# EAGLE board TDA7053A Stereo (EAGLE 6.2)
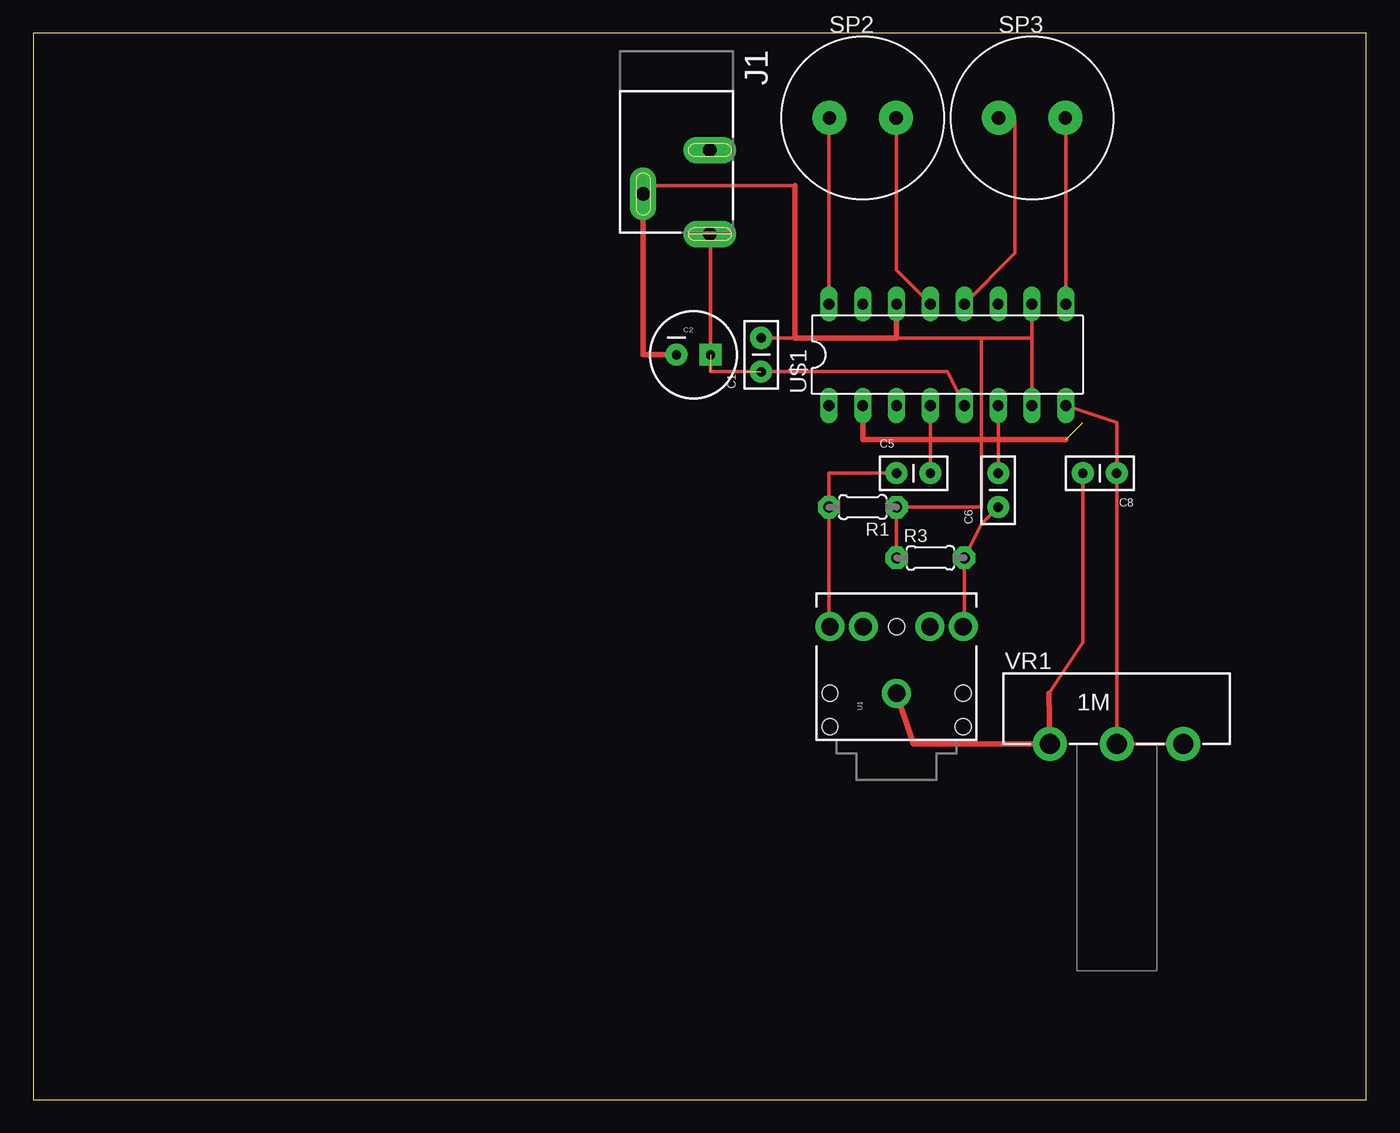
[diagram p0: board, top side]
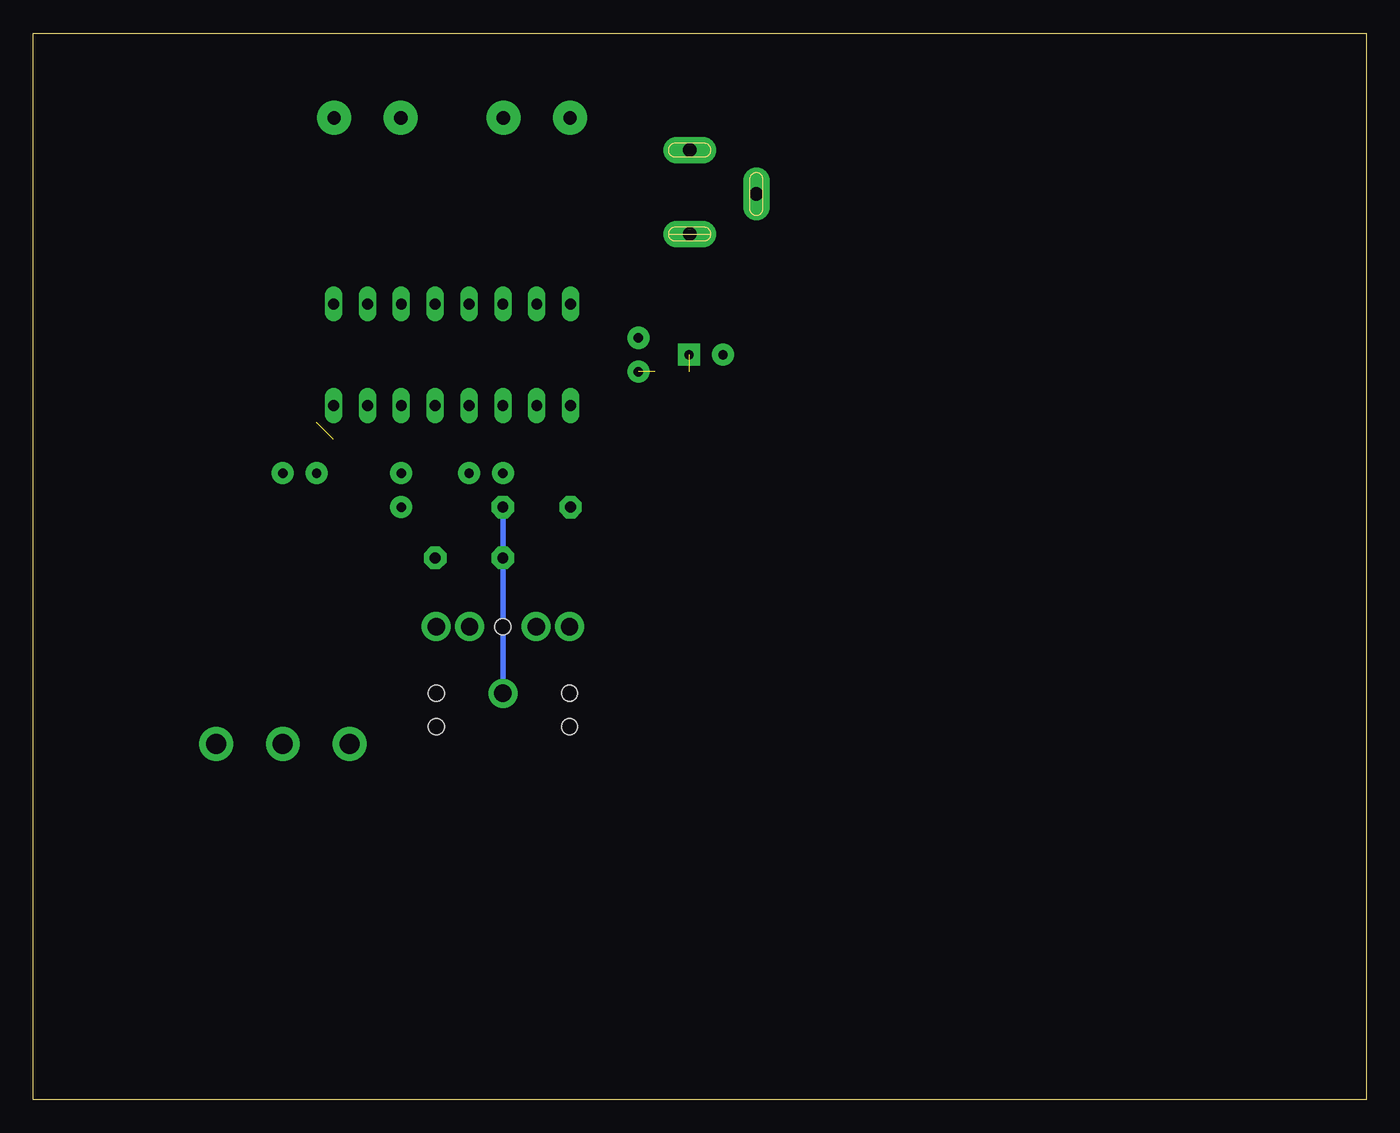
[diagram p1: board, bottom side, seen from below]

Size 100 x 80 mm. Coordinates in mm from the lower left corner, seen from the top.
Outline: 0,0 100,0 100,80 0,80 0,0
Copper layers (1*16): Top 0.035mm / dielectric 1.5mm / Bottom 0.035mm
Design rules: minimum track width 10mil, minimum drill 24mil, track to track 8mil, track to pad 8mil, pad to pad 8mil, via to via 8mil, smd to smd 8mil, copper to edge 40mil, drill to drill 8mil, minimum pad ring 10mil, minimum via ring 8mil, stop-mask expansion 4mil, vias tented up to drill 0mil, thermal gap 10mil

## Footprints (pad centres in the part's own frame; a part is rotated, then mirrored left to right if it is on the bottom)
CAP-PTH-SMALL2 = drill 0.7 pad 1.651: 1 0,0; 2 2.54,0
CPOL-RADIAL-100UF-25V = drill 0.7 pad 1.651 square: 1 1.27,0 | drill 0.7 pad 1.651: 2 -1.27,0
POWER_JACK_SLOT = drill 1 pad 2 long: GND@1 2.58,7.5; GND@2 7.58,10.8; PWR 2.58,13.8
0204/5 = drill 0.813 pad 1.676 octagon: 1 -2.54,0; 2 2.54,0
PS12 = drill 1 pad 2.54: P$1 -2.5,0; P$2 2.5,0
AUDIO-JACK = drill 1.3 pad 2.184: RING 5,5; RSH 5,2.5; SLEEVE 0,0; TIP 5,-5; TSH 5,-2.5 | hole 1.2: 0,5; -2.5,5; -2.5,-5; 0,-5; 5,0
DIL16 = drill 0.813 long: 1 -8.89,-3.81; 2 -6.35,-3.81; 3 -3.81,-3.81; 4 -1.27,-3.81; 5 1.27,-3.81; 6 3.81,-3.81; 7 6.35,-3.81; 8 8.89,-3.81; 9 8.89,3.81; 10 6.35,3.81; 11 3.81,3.81; 12 1.27,3.81; 13 -1.27,3.81; 14 -3.81,3.81; 15 -6.35,3.81; 16 -8.89,3.81
POT_ALPHA_RV16AF-20 = drill 1.5 pad 2.54: 1 -5,0; 2 0,0; 3 5,0

## Placement (x,y rotation side)
C1  0.1u  [CAP-PTH-SMALL2]  54.61,54.61 90 top
C2  220u  [CPOL-RADIAL-100UF-25V]  49.53,55.88 0 top
C5  0.47u  [CAP-PTH-SMALL2]  64.77,46.99 0 top
C6  0.47u  [CAP-PTH-SMALL2]  72.39,44.45 90 top
C8  0.1u  [CAP-PTH-SMALL2]  81.28,46.99 180 top
J1  POWER_JACKSLT  [POWER_JACK_SLOT]  53.34,78.74 180 top
R1  4k7  [0204/5]  62.23,44.45 180 top
R3  4k7  [0204/5]  67.31,40.64 0 top
SP2  SP  [PS12]  62.23,73.66 0 top
SP3  SP  [PS12]  74.93,73.66 0 top
U1  [AUDIO-JACK]  64.77,30.48 90 top
U$1  TDA7053A  [DIL16]  68.58,55.88 0 top
VR1  1M  [POT_ALPHA_RV16AF-20]  81.28,26.67 0 top

## Library data of the parts
C1 C2 C5 C6 C8 J1 U1 = SparkFun
R1 R3 = adafruit
SP2 SP3 U$1 VR1 = My Library

## Nets
GND: C1.2 C2.2 C8.2 J1.GND@2 R1.1 R3.1 U1.SLEEVE U$1.7 U$1.10 U$1.14 VR1.1
N$4: C5.1 R1.2 U1.RING
N$6: C6.1 R3.2 U1.TIP
N$7: SP3.P$2 U$1.9
N$10: SP3.P$1 U$1.12
N$11: SP2.P$2 U$1.13
N$12: SP2.P$1 U$1.16
N$14: C6.2 U$1.6
N$15: C5.2 U$1.4
N$17: C1.1 C2.1 J1.PWR U$1.5
N$19: C8.1 U$1.2 U$1.8 VR1.2 VR1.3

## Tracks (layer width: path | path; a pad name or v marks a point on that pad's centre or on a via)
GND
  Top 0.254: U$1.10 74.93,57.15 | 74.93,57.15 U$1.7 | R3.1 R1.1 71.12,44.45 71.12,57.15 | C8.2 78.74,34.29 76.2,30.48 | 76.2,30.48 VR1.1 76.2,30.48 | 71.12,57.15 64.77,57.15 U$1.14 | 71.12,57.15 74.93,57.15 | 57.15,68.58 45.72,68.58 J1.GND@2 | 57.15,57.15 C1.2
  Top 0.406: 76.2,30.48 VR1.1 76.2,26.67 73.66,26.67 66.04,26.67 U1.SLEEVE | U$1.14 64.77,57.15 58.42,57.15 57.15,57.15 57.15,68.58 | C2.2 45.76,55.88 J1.GND@2
  Bottom 0.406: R1.1 U1.SLEEVE
N$4
  Top 0.254: C5.1 63.5,46.99 59.69,46.99 R1.2 59.69,35.56 U1.RING
N$6
  Top 0.254: C6.1 71.12,43.18 R3.2 69.85,36.83 U1.TIP
N$7
  Top 0.254: 77.47,73.66 SP3.P$2 77.47,73.66 | 77.47,73.66 U$1.9
N$10
  Top 0.254: SP3.P$1 73.66,73.66 73.66,64.77 73.66,63.5 U$1.12
N$11
  Top 0.254: SP2.P$2 64.77,73.66 64.77,63.5 64.77,62.23 U$1.13
N$12
  Top 0.254: 59.69,73.66 SP2.P$1 59.69,73.66 | 59.69,73.66 U$1.16
N$14
  Top 0.254: C6.2 U$1.6
N$15
  Top 0.254: C5.2 U$1.4
N$17  (2 unrouted)
  Top 0.254: U$1.5 68.58,54.61 53.34,54.61 50.8,54.61 50.8,64.77 J1.PWR
N$19  (1 unrouted)
  Top 0.254: VR1.3 83.82,26.67 VR1.2 C8.1 81.28,50.8 U$1.8
  Top 0.406: U$1.2 62.23,49.53 77.47,49.53